# EAGLE board lipo_charger_PANEL (EAGLE 9.3.1)
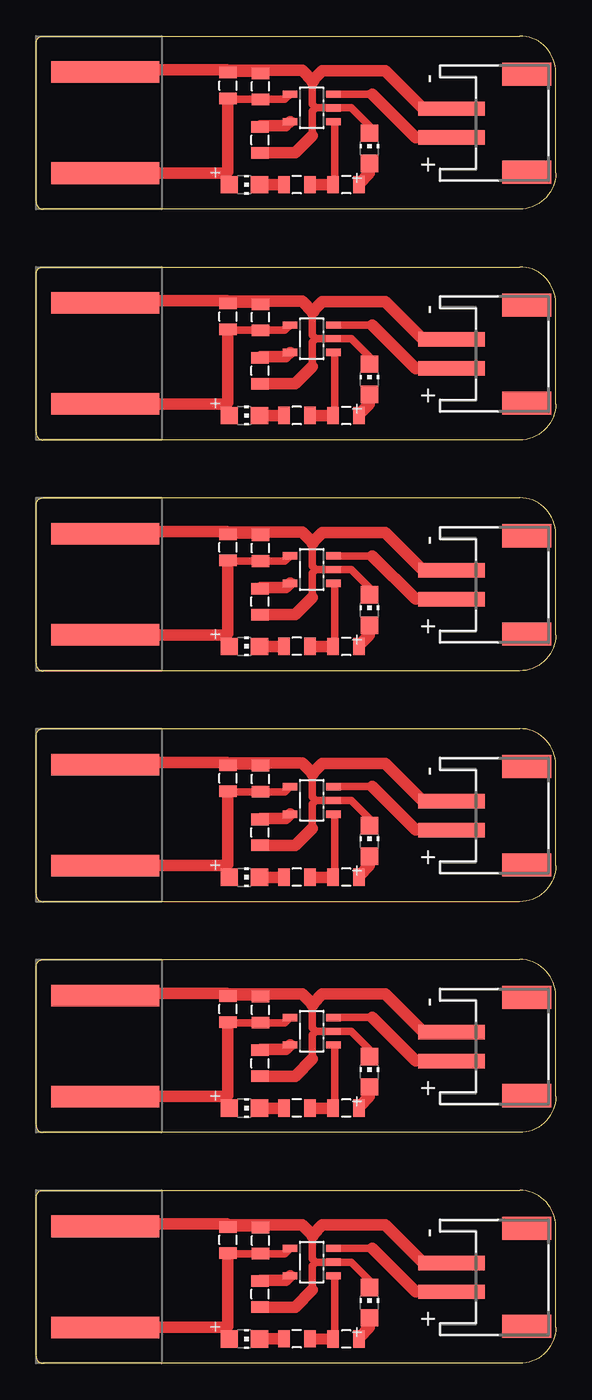
[diagram p0: board, top side]

Size 36 x 92 mm. Coordinates in mm from the lower left corner, seen from the top.
Outline: 0.5,12 33.5,12 arc-90 36,9.5 36,2.5 arc-90 33.5,0 0.5,0 arc-90 0,0.5 0,11.5 arc-90 0.5,12
Outline: 0.5,28 33.5,28 arc-90 36,25.5 36,18.5 arc-90 33.5,16 0.5,16 arc-90 0,16.5 0,27.5 arc-90 0.5,28
Outline: 0.5,44 33.5,44 arc-90 36,41.5 36,34.5 arc-90 33.5,32 0.5,32 arc-90 0,32.5 0,43.5 arc-90 0.5,44
Outline: 0.5,60 33.5,60 arc-90 36,57.5 36,50.5 arc-90 33.5,48 0.5,48 arc-90 0,48.5 0,59.5 arc-90 0.5,60
Outline: 0.5,76 33.5,76 arc-90 36,73.5 36,66.5 arc-90 33.5,64 0.5,64 arc-90 0,64.5 0,75.5 arc-90 0.5,76
Outline: 0.5,92 33.5,92 arc-90 36,89.5 36,82.5 arc-90 33.5,80 0.5,80 arc-90 0,80.5 0,91.5 arc-90 0.5,92
Copper layers (1*16): Top 0.035mm / dielectric 1.5mm / Bottom 0.035mm
Design rules "BantamDRC_1_32_v2": minimum track width 8mil, minimum drill 0.8mm, track to track 0.794003125mm, track to pad 0.794003125mm, pad to pad 0.794003125mm, via to via 0.794003125mm, smd to smd 0mil, copper to edge 0mil, drill to drill 1mil, minimum pad ring 10mil, minimum via ring 10mil, stop-mask expansion 1mil, vias tented up to drill 30mil, thermal gap 10mil

## Footprints (pad centres in the part's own frame; a part is rotated, then mirrored left to right if it is on the bottom)
0805 = smd 0.8 x 1.2: 1 -0.9,0; 2 0.9,0
JST-PH-2-SMT-RA = smd 1 x 4.6: 1 1,-3.7; 2 -1,-3.7 | smd 1.6 x 3.4: NC1 -3.4,1.5; NC2 3.4,1.5
SOT23-5L = smd 0.5 x 1: 1 -0.95,-1.5; 2 0,-1.5; 3 0.95,-1.5; 4 0.95,1.5; 5 -0.95,1.5
CHIP-LED0805 = smd 1.2 x 1.2: A 0,-1.05; C 0,1.05
USB-A-PCB-POWER = smd 7.5 x 1.5: 5V -0.2,-3.5; GND -0.2,3.5

## Placement (x,y rotation side)
C1  10uF  [0805]  13.3,8.56 90 top
C2  0.1uF  [0805]  15.55,8.51 90 top
C3  10uF  [0805]  13.3,24.56 90 top
C4  0.1uF  [0805]  15.55,24.51 90 top
C5  10uF  [0805]  13.3,40.56 90 top
C6  0.1uF  [0805]  15.55,40.51 90 top
C7  10uF  [0805]  13.3,56.56 90 top
C8  0.1uF  [0805]  15.55,56.51 90 top
C9  10uF  [0805]  13.3,72.56 90 top
C10  0.1uF  [0805]  15.55,72.51 90 top
C11  10uF  [0805]  13.3,88.56 90 top
C12  0.1uF  [0805]  15.55,88.51 90 top
CN1  [JST-PH-2-SMT-RA]  32.5,5.96 270 top
CN2  [JST-PH-2-SMT-RA]  32.5,21.96 270 top
CN3  [JST-PH-2-SMT-RA]  32.5,37.96 270 top
CN4  [JST-PH-2-SMT-RA]  32.5,53.96 270 top
CN5  [JST-PH-2-SMT-RA]  32.5,69.96 270 top
CN6  [JST-PH-2-SMT-RA]  32.5,85.96 270 top
IC1  LIPO_CHARGER/OT  [SOT23-5L]  19.1,23.02 90 top
IC2  LIPO_CHARGER/OT  [SOT23-5L]  19.1,7.02 90 top
IC3  LIPO_CHARGER/OT  [SOT23-5L]  19.1,39.02 90 top
IC4  LIPO_CHARGER/OT  [SOT23-5L]  19.1,55.02 90 top
IC5  LIPO_CHARGER/OT  [SOT23-5L]  19.1,71.02 90 top
IC6  LIPO_CHARGER/OT  [SOT23-5L]  19.1,87.02 90 top
LED1  RED-2V/20mA  [CHIP-LED0805]  14.44,1.7 270 top
LED2  GREEN-2V/20mA  [CHIP-LED0805]  23.1,4.21 0 top
LED3  RED-2V/20mA  [CHIP-LED0805]  14.44,17.7 270 top
LED4  GREEN-2V/20mA  [CHIP-LED0805]  23.1,20.21 0 top
LED5  RED-2V/20mA  [CHIP-LED0805]  14.44,33.7 270 top
LED6  GREEN-2V/20mA  [CHIP-LED0805]  23.1,36.21 0 top
LED7  RED-2V/20mA  [CHIP-LED0805]  14.44,49.7 270 top
LED8  GREEN-2V/20mA  [CHIP-LED0805]  23.1,52.21 0 top
LED9  RED-2V/20mA  [CHIP-LED0805]  14.44,65.7 270 top
LED10  GREEN-2V/20mA  [CHIP-LED0805]  23.1,68.21 0 top
LED11  RED-2V/20mA  [CHIP-LED0805]  14.44,81.7 270 top
LED12  GREEN-2V/20mA  [CHIP-LED0805]  23.1,84.21 0 top
R1  10k  [0805]  15.51,4.8 90 top
R2  150  [0805]  18.06,1.7 180 top
R3  150  [0805]  21.49,1.7 180 top
R4  150  [0805]  21.49,17.7 180 top
R5  150  [0805]  18.06,17.7 180 top
R6  10k  [0805]  15.51,20.8 90 top
R7  150  [0805]  21.49,33.7 180 top
R8  150  [0805]  18.06,33.7 180 top
R9  10k  [0805]  15.51,36.8 90 top
R10  150  [0805]  21.49,49.7 180 top
R11  150  [0805]  18.06,49.7 180 top
R12  10k  [0805]  15.51,52.8 90 top
R13  150  [0805]  21.49,65.7 180 top
R14  150  [0805]  18.06,65.7 180 top
R15  10k  [0805]  15.51,68.8 90 top
R16  150  [0805]  21.49,81.7 180 top
R17  150  [0805]  18.06,81.7 180 top
R18  10k  [0805]  15.51,84.8 90 top
U$1  USB-PCB-POWER  [USB-A-PCB-POWER]  5,22 0 top
U$2  USB-PCB-POWER  [USB-A-PCB-POWER]  5,6 0 top
U$3  USB-PCB-POWER  [USB-A-PCB-POWER]  5,38 0 top
U$4  USB-PCB-POWER  [USB-A-PCB-POWER]  5,54 0 top
U$5  USB-PCB-POWER  [USB-A-PCB-POWER]  5,70 0 top
U$6  USB-PCB-POWER  [USB-A-PCB-POWER]  5,86 0 top

## Library data of the parts
C1-C12 CN1-CN6 IC1-IC6 LED1-LED12 R1-R18 U$1-U$6 = homemade-hardware

## Nets
5V: C1.1 C2.1 IC2.4 LED1.A U$2.5V
5V1: C3.1 C4.1 IC1.4 LED3.A U$1.5V
5V2: C5.1 C6.1 IC3.4 LED5.A U$3.5V
5V3: C7.1 C8.1 IC4.4 LED7.A U$4.5V
5V4: C9.1 C10.1 IC5.4 LED9.A U$5.5V
5V5: C11.1 C12.1 IC6.4 LED11.A U$6.5V
BATTERY: CN1.1 IC2.3
BATTERY1: CN2.1 IC1.3
BATTERY2: CN3.1 IC3.3
BATTERY3: CN4.1 IC4.3
BATTERY4: CN5.1 IC5.3
BATTERY5: CN6.1 IC6.3
CURRENT-CONTROL: IC2.5 R1.2
CURRENT-CONTROL1: IC1.5 R6.2
CURRENT-CONTROL2: IC3.5 R9.2
CURRENT-CONTROL3: IC4.5 R12.2
CURRENT-CONTROL4: IC5.5 R15.2
CURRENT-CONTROL5: IC6.5 R18.2
GND: C1.2 C2.2 CN1.2 IC2.2 LED2.C R1.1 U$2.GND
GND1: C3.2 C4.2 CN2.2 IC1.2 LED4.C R6.1 U$1.GND
GND2: C5.2 C6.2 CN3.2 IC3.2 LED6.C R9.1 U$3.GND
GND3: C7.2 C8.2 CN4.2 IC4.2 LED8.C R12.1 U$4.GND
GND4: C9.2 C10.2 CN5.2 IC5.2 LED10.C R15.1 U$5.GND
GND5: C11.2 C12.2 CN6.2 IC6.2 LED12.C R18.1 U$6.GND
N$1: LED3.C R5.2
N$2: LED1.C R2.2
N$3: LED2.A R3.1
N$4: LED4.A R4.1
N$5: LED5.C R8.2
N$6: LED6.A R7.1
N$7: LED7.C R11.2
N$8: LED8.A R10.1
N$9: LED9.C R14.2
N$10: LED10.A R13.1
N$11: LED11.C R17.2
N$12: LED12.A R16.1
STATUS: IC2.1 R2.1 R3.2
STATUS1: IC1.1 R4.2 R5.1
STATUS2: IC3.1 R7.2 R8.1
STATUS3: IC4.1 R10.2 R11.1
STATUS4: IC5.1 R13.2 R14.1
STATUS5: IC6.1 R16.2 R17.1

## Tracks (layer width: path | path; a pad name or v marks a point on that pad's centre or on a via)
5V
  Top 0.406: 13.21,2.5 13.28,2.56
  Top 0.508: IC2.4 17.24,7.62 C2.1 | C2.1 13.3,7.62 | LED1.A 13.3,1.7 13.3,2.58 13.28,2.56 | C2.1 13.35,7.62 C1.1
  Top 0.813: C1.1 13.3,2.58 | U$2.5V 13.21,2.5
5V1
  Top 0.406: 13.21,18.5 13.28,18.57
  Top 0.508: IC1.4 17.24,23.61 C4.1 | C4.1 13.3,23.61 | LED3.A 13.3,17.7 13.3,18.59 13.28,18.57 | C4.1 13.35,23.61 C3.1
  Top 0.813: C3.1 13.3,18.59 | U$1.5V 13.21,18.5
5V2
  Top 0.406: 13.21,34.5 13.28,34.56
  Top 0.508: IC3.4 17.24,39.62 C6.1 | C6.1 13.3,39.62 | LED5.A 13.3,33.7 13.3,34.59 13.28,34.56 | C6.1 13.35,39.62 C5.1
  Top 0.813: C5.1 13.3,34.59 | U$3.5V 13.21,34.5
5V3
  Top 0.406: 13.21,50.5 13.28,50.56
  Top 0.508: IC4.4 17.24,55.62 C8.1 | C8.1 13.3,55.62 | LED7.A 13.3,49.7 13.3,50.59 13.28,50.56 | C8.1 13.35,55.62 C7.1
  Top 0.813: C7.1 13.3,50.59 | U$4.5V 13.21,50.5
5V4
  Top 0.406: 13.21,66.5 13.28,66.56
  Top 0.508: IC5.4 17.24,71.61 C10.1 | C10.1 13.3,71.61 | LED9.A 13.3,65.7 13.3,66.58 13.28,66.56 | C10.1 13.35,71.61 C9.1
  Top 0.813: C9.1 13.3,66.58 | U$5.5V 13.21,66.5
5V5
  Top 0.406: 13.21,82.5 13.28,82.56
  Top 0.508: IC6.4 17.24,87.61 C12.1 | C12.1 13.3,87.61 | LED11.A 13.3,81.7 13.3,82.58 13.28,82.56 | C12.1 13.35,87.61 C11.1
  Top 0.813: C11.1 13.3,82.58 | U$6.5V 13.21,82.5
BATTERY
  Top 0.508: IC2.3 23.29,7.97 | 26.3,4.96 CN1.1
  Top 0.813: 23.29,7.97 26.3,4.96
BATTERY1
  Top 0.508: IC1.3 23.29,23.97 | 26.3,20.96 CN2.1
  Top 0.813: 23.29,23.97 26.3,20.96
BATTERY2
  Top 0.508: IC3.3 23.29,39.97 | 26.3,36.97 CN3.1
  Top 0.813: 23.29,39.97 26.3,36.97
BATTERY3
  Top 0.508: IC4.3 23.29,55.97 | 26.3,52.97 CN4.1
  Top 0.813: 23.29,55.97 26.3,52.97
BATTERY4
  Top 0.508: IC5.3 23.29,71.97 | 26.3,68.97 CN5.1
  Top 0.813: 23.29,71.97 26.3,68.97
BATTERY5
  Top 0.508: IC6.3 23.29,87.97 | 26.3,84.97 CN6.1
  Top 0.813: 23.29,87.97 26.3,84.97
CURRENT-CONTROL
  Top 0.813: IC2.5 17.3,5.77 15.58,5.77 R1.2
CURRENT-CONTROL1
  Top 0.813: IC1.5 17.3,21.77 15.58,21.77 R6.2
CURRENT-CONTROL2
  Top 0.813: IC3.5 17.3,37.77 15.58,37.77 R9.2
CURRENT-CONTROL3
  Top 0.813: IC4.5 17.3,53.77 15.58,53.77 R12.2
CURRENT-CONTROL4
  Top 0.813: IC5.5 17.3,69.77 15.58,69.77 R15.2
CURRENT-CONTROL5
  Top 0.813: IC6.5 17.3,85.77 15.58,85.77 R18.2
GND
  Top 0.508: 19.39,7.02 IC2.2 21.85,7.02 23.1,5.77 LED2.C | 19.39,7.02 19.15,7.26 19.15,8.81 | 19.39,7.02 19.15,6.78 19.15,5.09 | C2.2 13.35,9.41 C1.2 | CN1.2 26.84,6.96
  Top 0.813: 19.2,8.96 19.25,8.91 19.15,8.81 | 26.84,6.96 24.2,9.6 19.83,9.6 19.2,8.96 | 19.2,8.96 19.15,8.91 18.44,9.62 13.45,9.62 C1.2 13.3,9.56 13.2,9.66 4.96,9.66 U$2.GND | 19.15,5.09 17.96,3.9 R1.1
GND1
  Top 0.508: 19.39,23.02 IC1.2 21.85,23.02 23.1,21.77 LED4.C | 19.39,23.02 19.15,23.27 19.15,24.82 | 19.39,23.02 19.15,22.78 19.15,21.09 | C4.2 13.35,25.41 C3.2 | CN2.2 26.84,22.96
  Top 0.813: 19.2,24.96 19.25,24.91 19.15,24.82 | 26.84,22.96 24.2,25.6 19.83,25.6 19.2,24.96 | 19.2,24.96 19.15,24.91 18.44,25.62 13.45,25.62 C3.2 13.3,25.57 13.2,25.66 4.96,25.66 U$1.GND | 19.15,21.09 17.96,19.9 R6.1
GND2
  Top 0.508: 19.39,39.02 IC3.2 21.85,39.02 23.1,37.77 LED6.C | 19.39,39.02 19.15,39.27 19.15,40.81 | 19.39,39.02 19.15,38.78 19.15,37.09 | C6.2 13.35,41.41 C5.2 | CN3.2 26.84,38.97
  Top 0.813: 19.2,40.97 19.25,40.91 19.15,40.81 | 26.84,38.97 24.2,41.6 19.83,41.6 19.2,40.97 | 19.2,40.97 19.15,40.91 18.44,41.62 13.45,41.62 C5.2 13.3,41.56 13.2,41.66 4.96,41.66 U$3.GND | 19.15,37.09 17.96,35.9 R9.1
GND3
  Top 0.508: 19.39,55.02 IC4.2 21.85,55.02 23.1,53.77 LED8.C | 19.39,55.02 19.15,55.27 19.15,56.81 | 19.39,55.02 19.15,54.78 19.15,53.09 | C8.2 13.35,57.41 C7.2 | CN4.2 26.84,54.97
  Top 0.813: 19.2,56.97 19.25,56.91 19.15,56.81 | 26.84,54.97 24.2,57.6 19.83,57.6 19.2,56.97 | 19.2,56.97 19.15,56.91 18.44,57.62 13.45,57.62 C7.2 13.3,57.56 13.2,57.66 4.96,57.66 U$4.GND | 19.15,53.09 17.96,51.9 R12.1
GND4
  Top 0.508: 19.39,71.02 IC5.2 21.85,71.02 23.1,69.77 LED10.C | 19.39,71.02 19.15,71.27 19.15,72.81 | 19.39,71.02 19.15,70.78 19.15,69.09 | C10.2 13.35,73.42 C9.2 | CN5.2 26.84,70.97
  Top 0.813: 19.2,72.97 19.25,72.92 19.15,72.81 | 26.84,70.97 24.2,73.6 19.83,73.6 19.2,72.97 | 19.2,72.97 19.15,72.92 18.44,73.62 13.45,73.62 C9.2 13.3,73.56 13.2,73.67 4.96,73.67 U$5.GND | 19.15,69.09 17.96,67.9 R15.1
GND5
  Top 0.508: 19.39,87.02 IC6.2 21.85,87.02 23.1,85.77 LED12.C | 19.39,87.02 19.15,87.27 19.15,88.81 | 19.39,87.02 19.15,86.78 19.15,85.09 | C12.2 13.35,89.42 C11.2 | CN6.2 26.84,86.97
  Top 0.813: 19.2,88.97 19.25,88.92 19.15,88.81 | 26.84,86.97 24.2,89.6 19.83,89.6 19.2,88.97 | 19.2,88.97 19.15,88.92 18.44,89.62 13.45,89.62 C11.2 13.3,89.56 13.2,89.67 4.96,89.67 U$6.GND | 19.15,85.09 17.96,83.9 R18.1
N$1
  Top 0.508: R5.2
  Top 0.813: R5.2 LED3.C
N$2
  Top 0.508: R2.2
  Top 0.813: R2.2 LED1.C
N$3
  Top 0.508: R3.1 22.39,1.78 | 23.1,2.5
  Top 0.813: 22.39,1.78 23.1,2.5 | 23.1,2.5 LED2.A
N$4
  Top 0.508: R4.1 22.39,17.79 | 23.1,18.5
  Top 0.813: 22.39,17.79 23.1,18.5 | 23.1,18.5 LED4.A
N$5
  Top 0.508: R8.2
  Top 0.813: R8.2 LED5.C
N$6
  Top 0.508: R7.1 22.39,33.78 | 23.1,34.5
  Top 0.813: 22.39,33.78 23.1,34.5 | 23.1,34.5 LED6.A
N$7
  Top 0.508: R11.2
  Top 0.813: R11.2 LED7.C
N$8
  Top 0.508: R10.1 22.39,49.78 | 23.1,50.5
  Top 0.813: 22.39,49.78 23.1,50.5 | 23.1,50.5 LED8.A
N$9
  Top 0.508: R14.2
  Top 0.813: R14.2 LED9.C
N$10
  Top 0.508: R13.1 22.39,65.78 | 23.1,66.5
  Top 0.813: 22.39,65.78 23.1,66.5 | 23.1,66.5 LED10.A
N$11
  Top 0.508: R17.2
  Top 0.813: R17.2 LED11.C
N$12
  Top 0.508: R16.1 22.39,81.78 | 23.1,82.5
  Top 0.813: 22.39,81.78 23.1,82.5 | 23.1,82.5 LED12.A
STATUS
  Top 0.508: 19.07,1.68 R2.1 | IC2.1 20.7,5.97 20.7,1.81 R3.2
  Top 0.813: R3.2 19.07,1.68
STATUS1
  Top 0.508: 19.07,17.68 R5.1 | IC1.1 20.7,21.97 20.7,17.81 R4.2
  Top 0.813: R4.2 19.07,17.68
STATUS2
  Top 0.508: 19.07,33.68 R8.1 | IC3.1 20.7,37.97 20.7,33.81 R7.2
  Top 0.813: R7.2 19.07,33.68
STATUS3
  Top 0.508: 19.07,49.68 R11.1 | IC4.1 20.7,53.97 20.7,49.81 R10.2
  Top 0.813: R10.2 19.07,49.68
STATUS4
  Top 0.508: 19.07,65.68 R14.1 | IC5.1 20.7,69.97 20.7,65.81 R13.2
  Top 0.813: R13.2 19.07,65.68
STATUS5
  Top 0.508: 19.07,81.68 R17.1 | IC6.1 20.7,85.97 20.7,81.81 R16.2
  Top 0.813: R16.2 19.07,81.68